# EAGLE board Lighting Board (EAGLE 6.5.0)

Size 160 x 100 mm. Coordinates in mm from the lower left corner, seen from the top.
Outline: 0,0 160,0 160,100 0,100 0,0
Copper layers (1*16): Top 0.035mm / dielectric 1.5mm / Bottom 0.035mm
Design rules "default": minimum track width 10mil, minimum drill 24mil, track to track 8mil, track to pad 8mil, pad to pad 8mil, via to via 8mil, smd to smd 8mil, copper to edge 40mil, drill to drill 8mil, minimum pad ring 10mil, minimum via ring 8mil, stop-mask expansion 4mil, vias tented up to drill 0mil, thermal gap 10mil

## Footprints (pad centres in the part's own frame; a part is rotated, then mirrored left to right if it is on the bottom)
1206 = smd 1.6 x 1.8: 1 -1.4,0; 2 1.4,0
C_0805 = smd 1.3 x 1.5: 1 -0.95,0; 2 0.95,0
SCREWTERMINAL-5MM-2 = drill 1.3 pad 2.032 square: 1 0,0 | drill 1.3 pad 2.032: 2 5,0
1X04 = drill 1.016 pad 1.88 square: 1 0,0 | drill 1.016 pad 1.88: 2 2.54,0; 3 5.08,0; 4 7.62,0
1X02 = drill 1.016 pad 1.88: 1 0,0; 2 2.54,0
LED-1206 = smd 1.2 x 1.4: A -1.5,0; C 1.5,0
J_TOGGLE = drill 1.4 square: P$1 -3.25,0; P$2 3.25,0
TO220V = drill 1.016 long: 1 -2.54,0; 2 0,0; 3 2.54,0
DIP8 = drill 0.864 square: 1 -3.81,-3.81 | drill 0.864: 2 -1.27,-3.81; 3 1.27,-3.81; 4 3.81,-3.81; 5 3.81,3.81; 6 1.27,3.81; 7 -1.27,3.81; 8 -3.81,3.81
TO-220 = drill 1.397 square: 1 -2.54,0 | drill 1.397: 2 0,0; 3 2.54,0
R_0805 = smd 1.3 x 1.5: 1 -0.95,0; 2 0.95,0
SJ_2S-TRACE = smd 0.635 x 1.27: 1 -0.508,0; 2 0.508,0
DIL28-3 = drill 0.813 long: 1 -16.51,-3.81; 2 -13.97,-3.81; 3 -11.43,-3.81; 4 -8.89,-3.81; 5 -6.35,-3.81; 6 -3.81,-3.81; 7 -1.27,-3.81; 8 1.27,-3.81; 9 3.81,-3.81; 10 6.35,-3.81; 11 8.89,-3.81; 12 11.43,-3.81; 13 13.97,-3.81; 14 16.51,-3.81; 15 16.51,3.81; 16 13.97,3.81; 17 11.43,3.81; 18 8.89,3.81; 19 6.35,3.81; 20 3.81,3.81; 21 1.27,3.81; 22 -1.27,3.81; 23 -3.81,3.81; 24 -6.35,3.81; 25 -8.89,3.81; 26 -11.43,3.81; 27 -13.97,3.81; 28 -16.51,3.81
RJ45-8 = drill 1 pad 1.88 square: 1 -4.445,6.35 | drill 1 pad 1.88: 2 -3.175,8.89; 3 -1.905,6.35; 4 -0.635,8.89; 5 0.635,6.35; 6 1.905,8.89; 7 3.175,6.35; 8 4.445,8.89 | hole 3.2: -5.715,0; 5.715,0
HC49US = drill 0.7 pad 1.651: 1 -2.54,0; 2 2.54,0

## Placement (x,y rotation side)
C1  0.1uF  [1206]  -54.61,83.82 0 top  (outside the outline)
C2  0.1uF  [1206]  -59.69,83.82 0 top  (outside the outline)
C10  .1uF  [1206]  -64.77,83.82 0 top  (outside the outline)
CV1  [C_0805]  -35.56,82.55 0 top  (outside the outline)
CV2  [C_0805]  -40.64,82.55 0 top  (outside the outline)
JP1  M025MM  [SCREWTERMINAL-5MM-2]  -54.61,62.23 0 top  (outside the outline)
JP2  [1X04]  -68.58,78.74 0 top  (outside the outline)
JP3  M02PTH  [1X02]  -59.69,69.85 0 top  (outside the outline)
JP4  M02PTH  [1X02]  -72.39,67.31 0 top  (outside the outline)
JP5  M02PTH  [1X02]  -19.05,77.47 0 top  (outside the outline)
JP6  M02PTH  [1X02]  -27.94,77.47 0 top  (outside the outline)
JP7  M02PTH  [1X02]  -36.83,77.47 0 top  (outside the outline)
LED1  [LED-1206]  -72.39,74.93 0 top  (outside the outline)
LED2  [LED-1206]  -78.74,74.93 0 top  (outside the outline)
LED3  [LED-1206]  -16.51,82.55 0 top  (outside the outline)
LED4  [LED-1206]  -22.86,82.55 0 top  (outside the outline)
LED5  [LED-1206]  -29.21,82.55 0 top  (outside the outline)
MS  J_MC32857  [J_TOGGLE]  -72.39,95.25 0 top  (outside the outline)
Q1  MOSFET-NCHANNELFQP30N06L  [TO220V]  -50.8,25.4 0 top  (outside the outline)
Q2  Q_LTC490  [DIP8]  12.7,27.94 90 top
Q3  MOSFET-NCHANNELFQP30N06L  [TO220V]  -38.1,38.1 0 top  (outside the outline)
Q4  MOSFET-NCHANNELFQP30N06L  [TO220V]  -69.85,38.1 0 top  (outside the outline)
Q5  MOSFET-NCHANNELFQP30N06L  [TO220V]  -38.1,48.26 0 top  (outside the outline)
Q6  MOSFET-NCHANNELFQP30N06L  [TO220V]  -69.85,48.26 0 top  (outside the outline)
Q8  MOSFET-NCHANNELFQP30N06L  [TO220V]  -38.1,58.42 0 top  (outside the outline)
Q10  MOSFET-NCHANNELFQP30N06L  [TO220V]  -69.85,58.42 0 top  (outside the outline)
Q13  MOSFET-NCHANNELFQP30N06L  [TO220V]  -38.1,68.58 0 top  (outside the outline)
Q25  LDO  [TO-220]  -19.05,27.94 0 top  (outside the outline)
R1_M  200  [R_0805]  -55.88,77.47 180 top  (outside the outline)
R2  1k  [1206]  -69.85,83.82 0 top  (outside the outline)
R3  1k  [1206]  -74.93,83.82 0 top  (outside the outline)
R4  1k  [1206]  -80.01,83.82 0 top  (outside the outline)
R5  120 Ohm  [1206]  12.7,16.51 0 top
R6  120 Ohm  [1206]  6.35,16.51 180 top
R7  1k  [1206]  -25.4,88.9 0 top  (outside the outline)
R8  1k  [1206]  -30.48,88.9 0 top  (outside the outline)
R9  [1206]  -68.58,90.17 0 top  (outside the outline)
R10  1k  [1206]  -35.56,88.9 0 top  (outside the outline)
R11  [1206]  -15.24,92.71 0 top  (outside the outline)
R12  1k  [1206]  -40.64,88.9 0 top  (outside the outline)
R13  200  [1206]  -45.72,88.9 0 top  (outside the outline)
R14  200  [1206]  -50.8,88.9 0 top  (outside the outline)
R15  1k  [1206]  -55.88,88.9 0 top  (outside the outline)
R16  200  [1206]  -60.96,88.9 0 top  (outside the outline)
SJ1  SOLDERJUMPERTRACE  [SJ_2S-TRACE]  -49.53,83.82 0 top  (outside the outline)
U1  ATMEGA328P_PDIP  [DIL28-3]  26.67,27.94 90 top
U$1  RJ45-8PTH  [RJ45-8]  8.89,2.54 0 top
Y1  [HC49US]  -45.72,76.2 0 top  (outside the outline)

## Library data of the parts
C1 C2 R2-R16 SJ1 = SparkFun-Passives
C10 = SparkFun-Retired; PROD_ID: CAP-10009
CV1 CV2 R1_M = Lib_Passive
JP1-JP7 U$1 = SparkFun-Connectors
LED1-LED5 = LilyPad-Wearables
MS Q2 Q25 = PCB0M1
Q1 Q3-Q6 Q8 Q10 Q13 = SparkFun-DiscreteSemi; PROD_ID: TRANS-10060
U1 = SparkFun-DigitalIC
Y1 = SparkFun-FreqCtrl

## Nets
D1: Q10.1 R12.2 U1.13
D2: Q13.1 R15.2 U1.14
GND: C1.2 C2.2 C10.2 CV1.2 CV2.2 JP1.2 MS.P$1 Q1.3 Q2.4 Q3.3 Q4.3 Q5.3 Q6.3 Q8.3 Q10.3 Q13.3 Q25.2 R2.1 R3.1 R4.1 R7.1 R8.1 R10.1 R12.1 R15.1 SJ1.1 U1.8 U1.22
N$1: Q2.5 R6.2 U$1.1
N$2: C2.1 U1.10 Y1.1
N$4: LED1.A R9.1
N$5: LED2.A R11.1
N$6: LED3.A R13.1
N$7: LED4.A R14.1
N$8: LED5.A R16.1
N$9: Q2.6 R6.1 U$1.2
N$10: Q2.7 R5.2 U$1.6
N$11: Q2.8 R5.1 U$1.3
N$12: SJ1.2 U$1.7 U$1.8
N$13: C1.1 U1.9 Y1.2
N$15: JP2.2 Q1.2
N$16: JP2.3 Q3.2
N$17: JP2.4 Q4.2
N$88: MS.P$2 R1_M.1 U1.1
N%2: JP4.2 LED3.C Q6.2
N%3: JP3.2 LED4.C Q5.2
N%106: JP5.2 LED5.C Q8.2
N%107: JP6.2 LED2.C Q10.2
N%110: JP7.2 LED1.C Q13.2
PWM1: Q3.1 R3.2 U1.5
PWM2: Q4.1 R4.2 U1.11
PWM3: Q1.1 R2.2 U1.12
PWM4: Q5.1 R7.2 U1.15
PWM5: Q6.1 R8.2 U1.16
PWM6: Q8.1 R10.2 U1.17
RXD: Q2.2 U1.2
TXD: Q2.3 U1.3
V5: C10.1 CV2.1 Q2.1 Q25.3 R1_M.2 U1.7 U1.20
VIN: CV1.1 JP1.1 JP2.1 JP3.1 JP4.1 JP5.1 JP6.1 JP7.1 Q25.1 R9.2 R11.2 R13.2 R14.2 R16.2

## Tracks (layer width: path | path; a pad name or v marks a point on that pad's centre or on a via)
D1  (2 unrouted)
D2  (2 unrouted)
GND  (27 unrouted)
N$1  (2 unrouted)
N$2  (2 unrouted)
N$4  (1 unrouted)
N$5  (1 unrouted)
N$6  (1 unrouted)
N$7  (1 unrouted)
N$8  (1 unrouted)
N$9  (2 unrouted)
N$10  (2 unrouted)
N$11  (2 unrouted)
N$12  (2 unrouted)
N$13  (2 unrouted)
N$15  (1 unrouted)
N$16  (1 unrouted)
N$17  (1 unrouted)
N$88  (2 unrouted)
N%2  (2 unrouted)
N%3  (2 unrouted)
N%106  (2 unrouted)
N%107  (2 unrouted)
N%110  (2 unrouted)
PWM1  (2 unrouted)
PWM2  (2 unrouted)
PWM3  (2 unrouted)
PWM4  (2 unrouted)
PWM5  (2 unrouted)
PWM6  (2 unrouted)
RXD  (1 unrouted)
TXD  (1 unrouted)
V5  (6 unrouted)
VIN  (13 unrouted)